# Altium PCB XDAmpPCB.PcbDoc
Units mm, origin at the board's own origin, x right, y up, seen from the top; angles counter-clockwise.
Board outline 149.99 x 99.95 mm, 2 copper layers (Top Layer, Bottom Layer); 83 components, 50 nets, 196 pads, 16 vias.
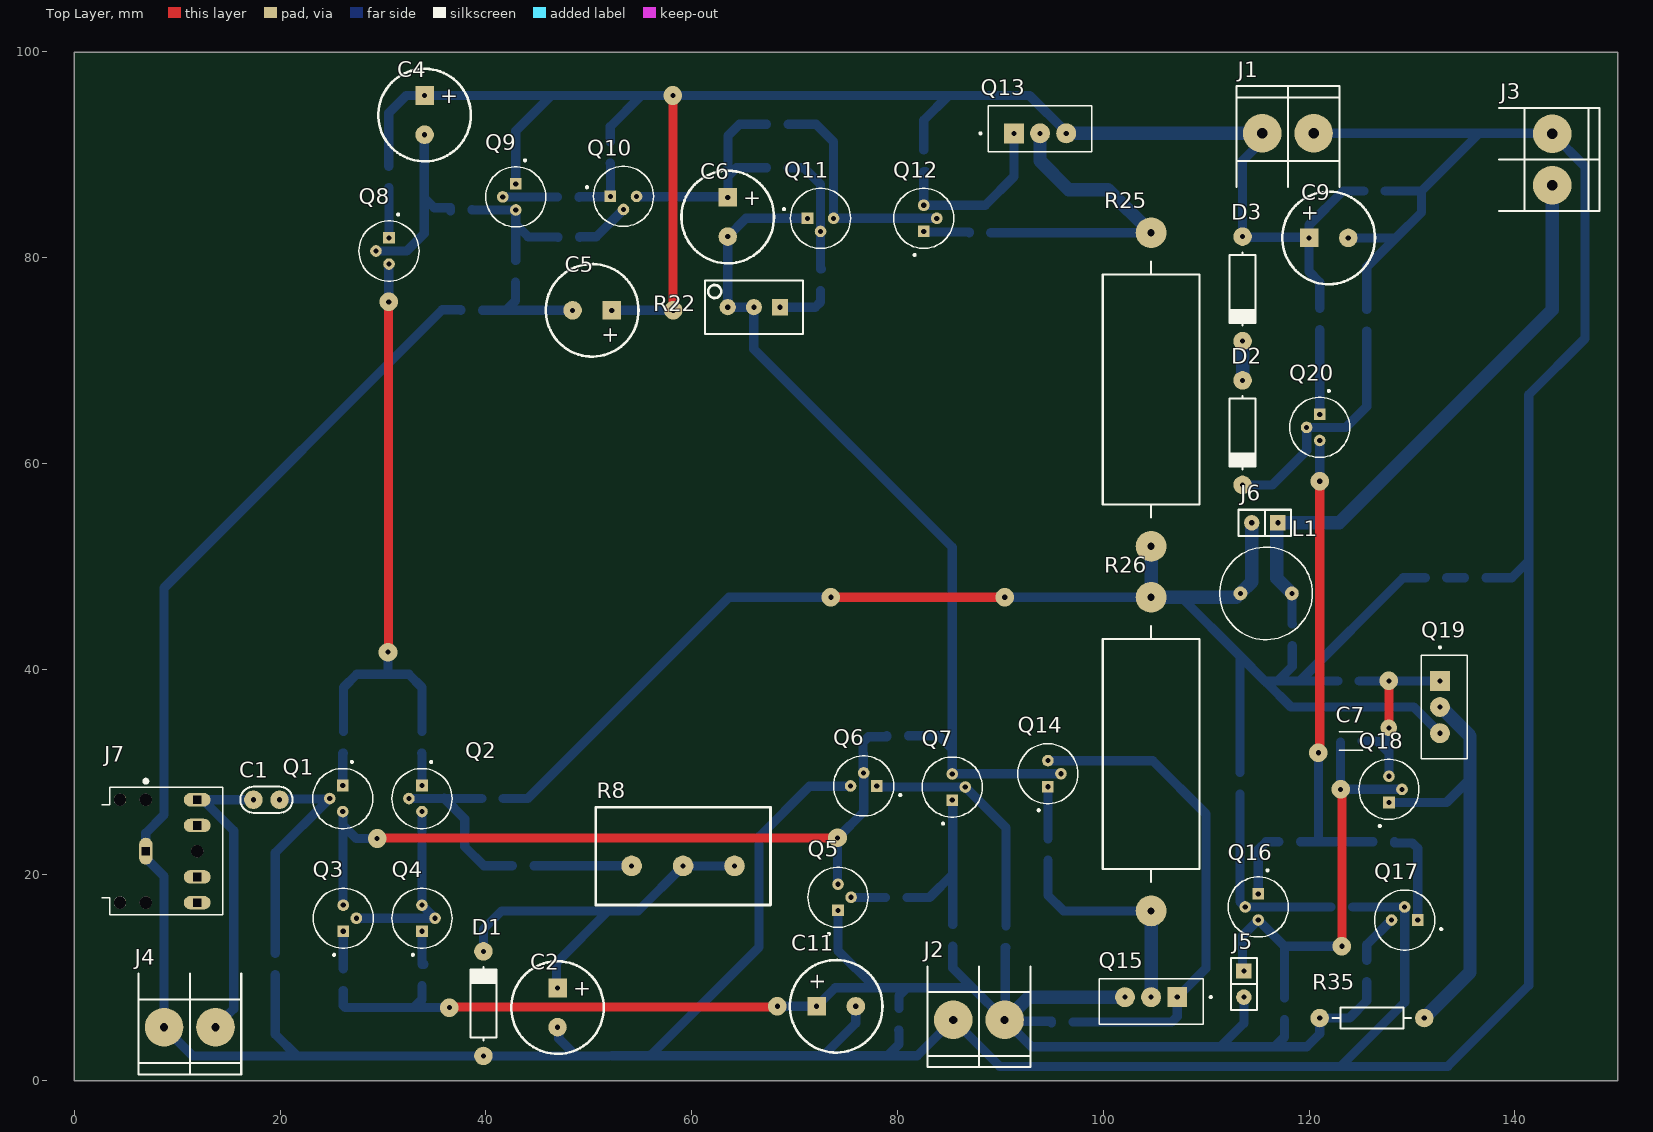
[diagram p0: Top Layer view]
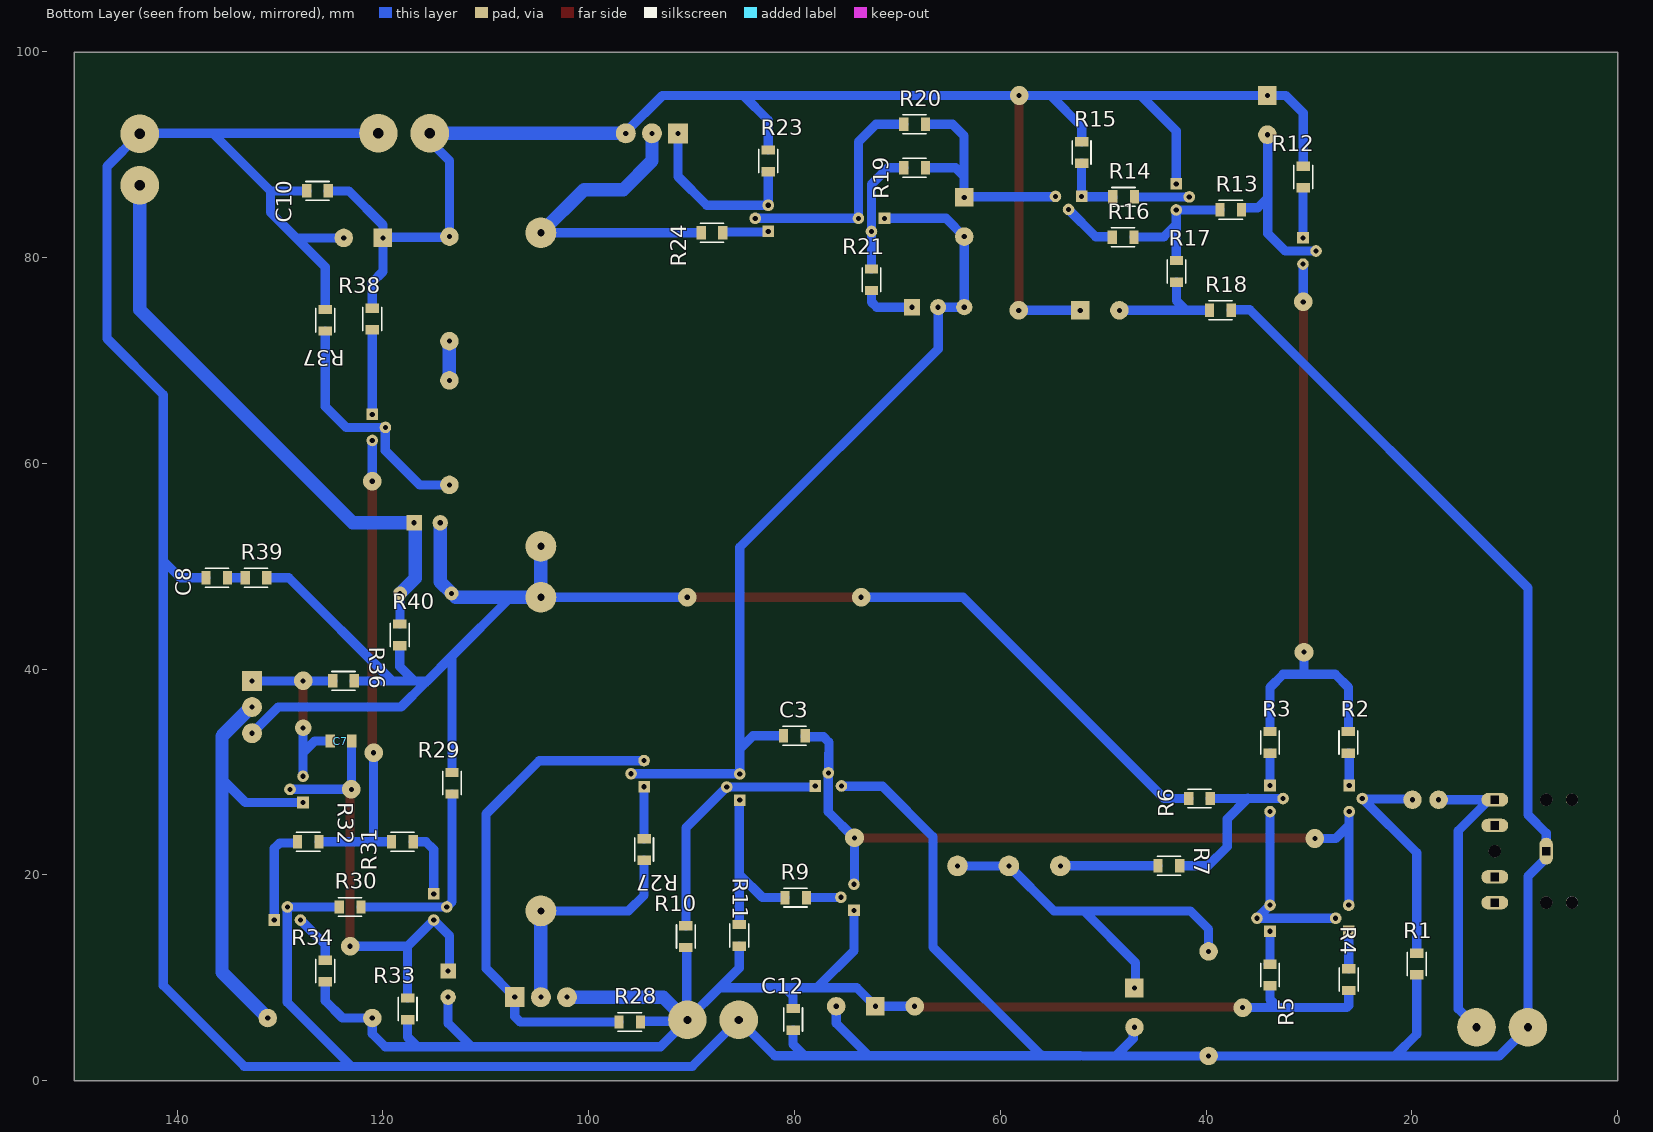
[diagram p1: Bottom Layer view, seen from below]
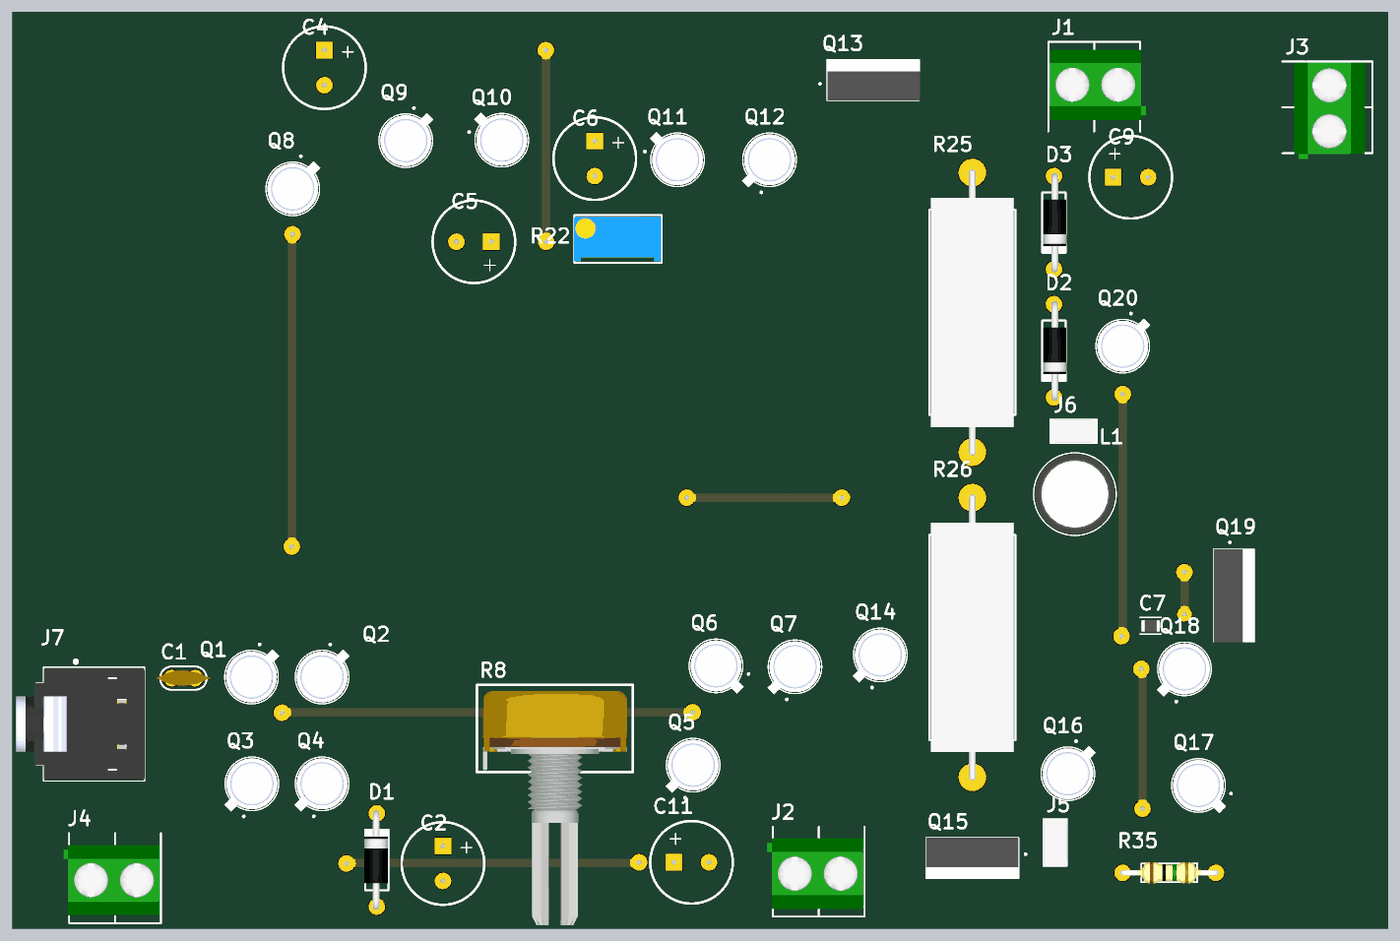
[diagram p2: 3D render of the assembled board from above, using the file's embedded part models]
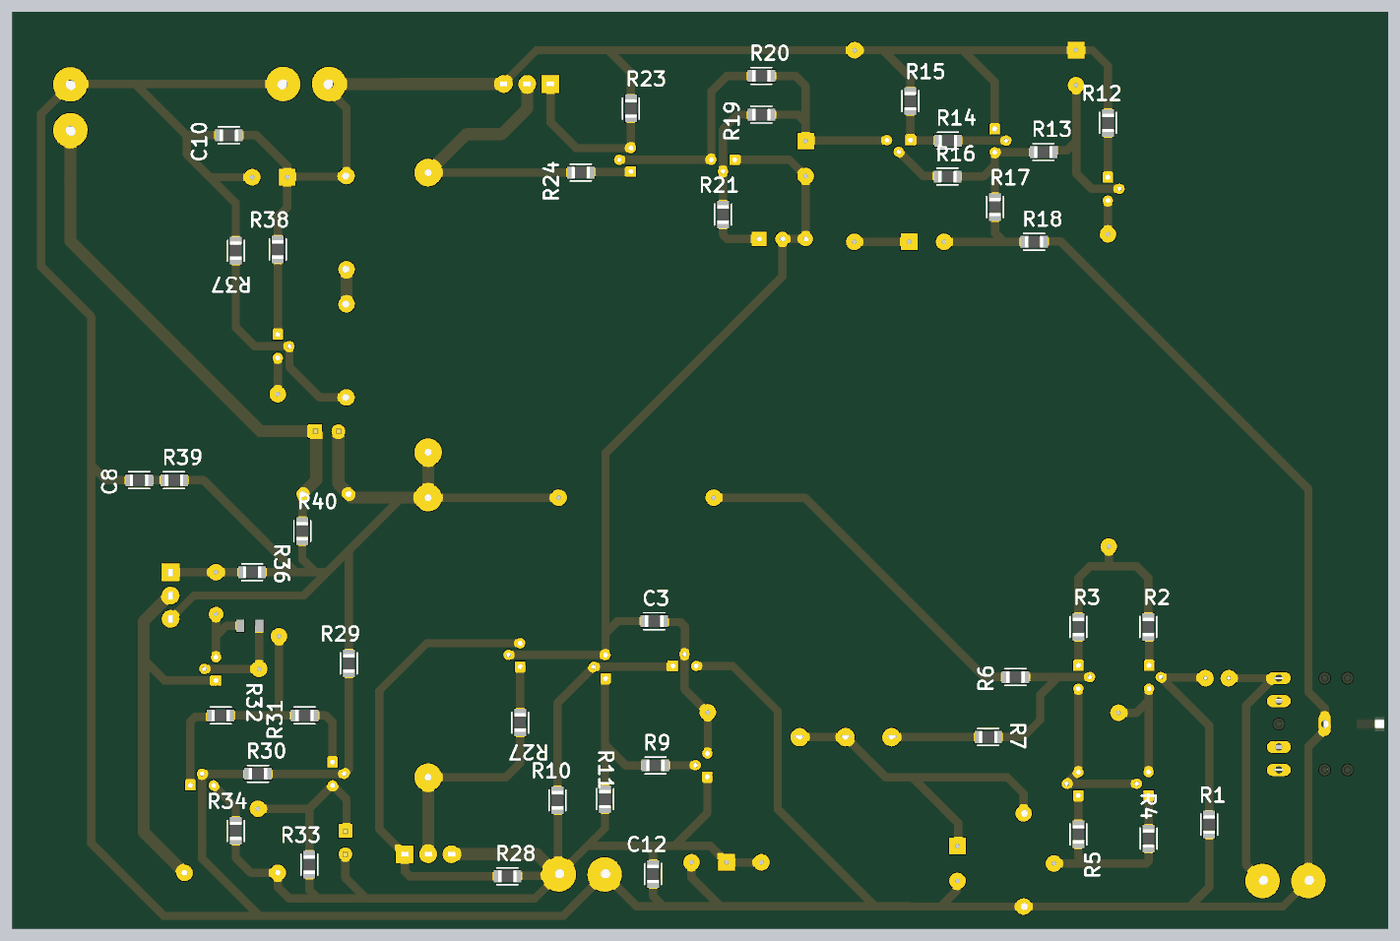
[diagram p3: 3D render of the assembled board from below, using the file's embedded part models]

## Layer stack, top to bottom
Top Solder: solder mask 0.0102, Solder Resist, Dk 3.5
Top Layer: signal copper 0.0356
Dielectric 1: dielectric 0.32, FR-4, Dk 4.8
Bottom Layer: signal copper 0.0356
Bottom Solder: solder mask 0.0102, Solder Resist, Dk 3.5

## Board outline
0,0 149.987,0 149.987,99.949 0,99.949

## Design rules (kind name [scope] priority, off if disabled: settings)
Clearance [All] p1: gap=0.254 ignorepadtopadclearanceinfootprint=FALSE except(0: Arc-Hole Track-Hole SMDPad-Hole THPad-Hole Via-Hole Fill-Hole Poly-Hole Region-Hole Text-Hole; 0.5: Arc-Poly Track-Poly SMDPad-Poly THPad-Poly Via-Poly Fill-Poly)
PolygonConnect [All] p1: connectstyle=Relief reliefconductorwidth=0.254 reliefentries=4 polygonreliefangle="90 Angle" airgapwidth=0.254
RoutingVias [All] p1: holewidth=0.711 width=1.27 viastyle="Through Hole" minholewidth=0.711 minwidth=1.27 maxholewidth=0.711 maxwidth=1.27
SolderMaskExpansion [All] p1: expansion=0.102
Width [All] p1: maxlimit=1.3 minlimit=0.9 preferedwidth=0.9
30 further rules are at their usual default settings.

## Components (designator, comment, footprint, x,y, rotation, side; value= is the part's Value field where it differs from the comment)
C1 "2.2u" CAP100 18.669,27.312 r0 top
C2 "220u" CAP300RP 46.956,7.112 r270 top
C3 "100p" 0805CAP#1 80.01,33.528 r180 bottom
C4 "47u" CAP300RP 34.036,93.853 r270 top
C5 "47u" CAP300RP 50.327,74.879 r180 top
C6 "47u" CAP300RP 63.5,83.947 r270 top
C7 "100p" 0805CAP#2 124.079,33.02 r0 top
C8 "0.1u" 0805CAP#1 136.144,48.895 r180 bottom
C9 "220u" CAP300RP 121.904,81.915 r0 top
C10 "100n" 0805CAP#1 126.365,86.487 r0 bottom
C11 "220u" CAP300RP 74.041,7.239 r0 top
C12 "100n" 0805CAP#1 80.137,5.969 r270 bottom
D1 "DIODO" DO41 39.751,7.493 r90 top
D2 "DIODO" DO41 113.538,62.992 r270 top
D3 "DIODO" DO41 113.538,76.962 r270 top
J1 "BORNERA" BORNERA2#1 117.94,92.078 r270 top
J2 "BORNERA" BORNERA2#2 87.909,5.918 r90 top
J3 "BORNERA" BORNERA2#1 143.637,89.535 r180 top
J4 "BORNERA 2" BORNERA2#2 11.216,5.207 r90 top
J5 "JMP" JUMPER2 113.665,9.398 r270 top
J6 "JMP" JUMPER2 115.697,54.229 r180 top
J7 "3.5JACK" 3.5JACK 6.938,22.312 r0 top
L1 "1u" RADIALIND 115.824,47.371 r0 top
Q1 "2N2907" TO-18 26.086,27.432 r270 top
Q2 "2N2907" TO-18 33.782,27.432 r270 top
Q3 "2N2222A" TO-18 26.137,15.799 r90 top
Q4 "2N2222A" TO-18 33.782,15.799 r90 top
Q5 "2N2222A" TO-18 74.219,17.831 r90 top
Q6 "2N2222A" TO-18 76.708,28.651 r180 top
Q7 "2N2222A" TO-18 85.319,28.55 r90 top
Q8 "2N2907" TO-18 30.582,80.645 r270 top
Q9 "2N2907" TO-18 42.901,85.903 r270 top
Q10 "2N2907" TO-18 53.365,85.954 r0 top
Q11 "2N2222A" TO-18 72.517,83.82 r0 top
Q12 "2N2222A" TO-18 82.55,83.82 r90 top
Q13 "TIP115" TO-220 93.853,92.082 r0 top
Q14 "2N2907" TO-18 94.615,29.845 r90 top
Q15 "TIP110" TO-220 104.648,8.128 r180 top
Q16 "2N2907" TO-18 115.062,16.891 r270 top
Q17 "2N2907" TO-18 129.286,15.621 r180 top
Q18 "2N2222A" TO-18 127.762,28.321 r90 top
Q19 "TIP115" TO-220 132.715,36.322 r270 top
Q20 "2N2907" TO-18 121.031,63.5 r270 top
R1 "120k" 0805 19.533,11.354 r90 bottom
R2 "100" 0805 26.162,32.893 r90 bottom
R3 "100" 0805 33.782,32.893 r90 bottom
R4 "68" 0805 26.137,9.83 r90 bottom
R5 "68" 0805 33.782,10.287 r90 bottom
R6 "120k" 0805 40.64,27.432 r180 bottom
R7 "3.9k" 0805 43.612,20.904 r0 bottom
R8 "100k" POTENCIOMETRO 59.157,20.879 r0 top
R9 "1k" 0805 79.883,17.805 r180 bottom
R10 "1k" 0805 90.551,14.004 r90 bottom
R11 "47" 0805 85.369,14.131 r90 bottom
R12 "150" 0805 30.556,87.833 r90 bottom
R13 "1k" 0805 37.601,84.658 r180 bottom
R14 "1k" 0805 48.006,85.903 r180 bottom
R15 "100" 0805 52.094,90.212 r270 bottom
R16 "1k" 0805 48.057,81.991 r180 bottom
R17 "10k" 0805 42.875,78.664 r270 bottom
R18 "10k" 0805 38.608,74.879 r180 bottom
R19 "820" 0805 68.326,88.733 r0 bottom
R20 "15" 0805 68.326,92.964 r0 bottom
R21 "100" 0805 72.517,77.851 r270 bottom
R22 "1k" "PRESET V" 66.04,75.184 r180 top
R23 "180" 0805 82.55,89.408 r270 bottom
R24 "10" 0805 88.011,82.423 r0 bottom
R25 "0.1" RES1200 104.648,67.183 r90 top
R26 "0.1" RES1200 104.648,31.75 r90 top
R27 "10" 0805 94.615,22.479 r270 bottom
R28 "180" 0805 96.012,5.715 r180 bottom
R29 "10k" 0805 113.284,28.922 r90 bottom
R30 "1k" 0805 123.19,16.891 r180 bottom
R31 "1k" 0805 118.11,23.241 r0 bottom
R32 "1k" 0805 127.254,23.241 r180 bottom
R33 "270" 0805 117.602,6.985 r90 bottom
R34 "270" 0805 125.603,10.668 r90 bottom
R35 "0.68" RES400 121.031,6.096 r0 top
R36 "470" 0805 123.825,38.862 r180 bottom
R37 "47k" 0805 125.603,73.914 r270 bottom
R38 "100" 0805 121.031,74.041 r90 bottom
R39 "10" 0805 132.334,48.895 r0 bottom
R40 "10" 0805 118.364,43.341 r270 bottom

## Footprints (in the part's own frame and the unit in brackets; to place one, negate y for a bottom-side part, rotate by r counter-clockwise, add the part's x,y. Pads: shape width x height; smd on the part's side, far side on the other; paste and mask are expansions set on the pad)
3.5JACK [mm]
  oval 1.308x2.616 hole 0.8 square: 1(0,0)
  oval 2.616x1.308 hole 0.8 square: 2(5,-5) 3(5,5) 10(5,-2.5) 11(5,2.5)
  round 1.2 hole 1.2 unplated: ""(-2.5,-5) ""(-2.5,5) ""(0,-5) ""(0,5) ""(5,0)
  silkscreen extent -4.3,-6.2 7.5,6.97, body extent -6.49,-6 7.51,6, height 5.5
0805 [mm]
  rect 0.9x1.3 smd: 1(-1.05,0) 2(1.05,0)
  silkscreen extent -1.14,-0.91 1.14,0.91, body extent -1,-0.63 1,0.63, height 0.58
0805CAP#1 [mm]
  rect 0.9x1.3 smd: 1(-1.05,0) 2(1.05,0)
  silkscreen extent -1.14,-0.91 1.14,0.91, body extent -1,-0.63 1,0.63, height 0.58
0805CAP#2 [mm]
  rect 0.9x1.3 smd far side: 1(-1.05,0) 2(1.05,0)
  silkscreen extent -1.14,-0.91 1.14,0.91, body extent -1,-0.63 1,0.63, height 0.58
BORNERA2#1 [mm] "Bornera con Tornillos 5mm separación"
  round 3.75 hole 1: 1(0,2.5) 2(0,-2.5)
  silkscreen extent -4.6,-5 5.2,5, body extent -3.76,-4.89 3.94,5.61, height 10
BORNERA2#2 [mm] "Bornera con Tornillos 5mm separación"
  round 3.75 hole 0.8: 1(0,2.5) 2(0,-2.5)
  silkscreen extent -4.6,-5 5.2,5, body extent -3.76,-4.89 3.94,5.61, height 10
CAP100 [mm]
  round 1.8 hole 0.5: 1(-1.27,0) 2(1.27,0)
  silkscreen extent -2.54,-1.27 2.54,1.27, body extent -2.92,-0.84 2.92,0.86, height 6.12
CAP300RP [mm]
  rect 1.8x1.8 hole 0.5: 1(-1.905,0)
  round 1.8 hole 0.5: 2(1.905,0)
  silkscreen extent -4.5,-4.5 4.5,4.5
DO41 [mm]
  round 1.8 hole 0.5: 1(-5.08,0) 2(5.08,0)
  silkscreen extent -3.56,-1.27 3.56,1.27, body extent -5.46,-1.19 5.46,1.37, height 2.03
JUMPER2 [mm]
  rect 1.5x1.5 hole 0.5: 1(-1.27,0)
  round 1.5 hole 0.5: 2(1.27,0)
  silkscreen extent -2.54,-1.27 2.54,1.27, body extent -2.46,-1.27 2.54,1.27, height 9.5
POTENCIOMETRO [mm]
  round 2 hole 0.5: 1(-5,0) 2(0,0) 3(5,0)
  silkscreen extent -8.5,-3.8 8.5,5.7, body extent -7.87,-20.53 7.87,5.03, height 20.12
"PRESET V" [mil]
  rect 62x62 hole 19.68: 1(-100,0)
  round 62 hole 19.68: 2(0,0) 3(100,0)
  silkscreen extent -188,-102 188,102, body extent -185,-95 190,95, height 455
RADIALIND [mm]
  round 1.35 hole 0.5: 1(-2.5,0) 2(2.5,0)
  silkscreen extent -4.5,-4.5 4.5,4.5, body extent -4.35,-4.35 4.35,4.35, height 12.5
RES400 [mm]
  round 1.8 hole 0.5: 1(0,0) 2(10.16,0)
  silkscreen extent 1.27,-1.02 8.89,1.02, body extent -0.3,-1.14 10.46,1.17, height 2.43
RES1200 [mm]
  round 3 hole 0.7: 1(-15.24,0) 2(15.24,0)
  silkscreen extent -12.45,-4.7 12.45,4.7, body extent -15.62,-4.5 15.61,4.5, height 9.51
TO-18 [mm]
  rect 1.13x1.13 hole 0.5: 1(-1.27,0)
  round 1.13 hole 0.5: 2(0,-1.27) 3(1.27,0)
  silkscreen extent -3.66,-2.92 2.92,2.92, body extent -3.02,-2.79 2.79,3.02, height 5.33
TO-220 [mm]
  rect 1.935x1.935 / inner round 1.935 / far side rect 1.935x1.935 hole 0.5: 1(-2.54,0)
  round 1.935 hole 0.5: 2(0,0) 3(2.54,0)
  silkscreen extent -5.9,-1.79 5.05,2.66, body extent -5.02,-1.78 5.08,2.67, height 19.84

## Part data
C1 C3 C7 C8 C10 C12: library part CAP, "Capacitor SMD 4.7nF"
C2 C4 C5 C6 C9 C11: library part CAPPOL
J1 J2 J3: library part "BORNERA 2"
J5 J6: library part JUMPER
J7: "3.5 mm Right-Angle Stereo Jack, 5 Pin PCB Mount, Non-Threaded", Package=None, Availability=Unavailable, MP=SJ1-3525N, Price=None
L1: library part INDUCTOR_1
Q3 Q4 Q5 Q6 Q7 Q11 Q12 Q13 Q15 Q18 Q19: Manufacturer=JSMSEMI, Supplier Part Number=C916390, Supplier=JLCPCB
R1 R2 R3 R4 R5 R6 R7 R9 R10 R11 R12 R13 R14 R15 R16 R18 R19 R20 R21 R23 R24 R25 R26 R27 R28 R29 R30 R31 R32 R33 R34 R35 R36 R37 R38 R39 R40: library part RES, "Resistencia SMD 470ohms"
R8: library part POTENCIOMETRO
R17: library part RES
R22: library part PRESET

## Via types
v1: diameter 1.8, hole 0.5, Top Layer to Bottom Layer, 15 vias
v2: diameter 1.6, hole 0.5, Top Layer to Bottom Layer, 1 vias

## Nets (pads, with @x,y where several pads share a name; then routed paths per layer and width w, separated by ;. In a path a pad name is that pad's centre, name@x,y a point inside that pad or via, vN(x,y) a via of type N, cw(c..) or ccw(c..) an arc to the next point about the centre after c; other vN are vias at no path point)
-VCC: C11.1 C12.1 J2.2 J5.2 Q5.1 Q15.3 R4.1 R5.1 R10.1 R11.1 R28.2 R33.1 R34.1 R35.1 | length 160.5
  Top Layer w0.9: v1(36.449,7.112) 36.512,7.175 68.263,7.175 v1(68.326,7.239)
  Bottom Layer w0.9: R4.1 26.137,7.309 26.334,7.112 32.969,7.112 ; R5.1 33.782,7.874 33.731,7.874 32.969,7.112 ; v1(36.449,7.112) 32.969,7.112 ; v1(68.326,7.239) C11.1 73.939,9.042 77.826,9.042 ; Q5.1 74.219,12.649 77.826,9.042 ; C12.1 80.137,8.255 80.924,9.042 ; R11.1 85.369,10.958 87.285,9.042 ; R10.1 90.48,12.954 90.48,5.989 J2.2@90.435,5.944 ; J2.2@90.576,5.944 J2.2@90.435,5.944 ; R28.2@94.962,5.639 R28.2 94.962,5.779 J2.2@90.549,5.779 ; J5.2 113.665,5.588 111.379,3.302 ; R33.1 117.602,4.262 116.642,3.302 ; R34.1 125.603,7.766 123.933,6.096 R35.1 121.031,4.572 119.761,3.302 116.642,3.302 ; 77.826,9.042 80.924,9.042 ; 80.924,9.042 87.285,9.042 ; 87.285,9.042 J2.2 ; J2.2 J2.2@90.549,5.779 ; J2.2 J2.2@90.435,5.944 ; J2.2@90.549,5.779 93.026,3.302 111.379,3.302 ; 111.379,3.302 116.642,3.302
  Bottom Layer w1.3: J2.2@90.576,5.944 92.76,8.128 Q15.3
GND: C2.2 C8.1 C9.2 C10.2 C11.2 C12.2 D1.1 J1.1 J2.1 J3.2 J4.1 J7.1 Q6.3 Q17.2 R1.1 R18.2 R30.1 R37.1 | length 449.1
  Bottom Layer w0.9: R1.1 19.533,4.521 21.641,2.413 ; R18.2 37.558,74.93 35.763,74.93 8.716,47.883 8.716,25.849 6.938,24.071 J7.1 6.938,21.658 8.716,19.88 J4.1 11.51,2.413 21.641,2.413 ; C2.2 47.071,5.092 47.071,4.11 48.768,2.413 ; 51.943,2.413 48.768,2.413 ; 52.216,2.432 72.79,2.432 ; 56.12,2.576 66.548,13.005 66.548,23.724 71.45,28.626 75.286,28.626 Q6.3@75.253,28.658 ; C11.2 75.946,5.588 72.79,2.432 ; C12.2@80.086,4.919 C12.2 80.137,3.556 79.013,2.432 ; J1.1 136.528,92.078 ; C9.2 128.437,81.915 ; R30.1 Q17.2 129.286,7.62 123.063,1.397 ; R37.1 125.603,79.081 128.437,81.915 ; C10.2@127.415,86.467 C10.2 130.937,86.487 ; C8.1 139.7,48.895 141.351,50.546 ; 141.351,47.625 141.351,9.271 133.477,1.397 123.063,1.397 ; 141.351,47.879 141.351,50.546 ; 21.641,2.413 D1.1 48.768,2.413 ; 72.79,2.432 79.013,2.432 ; 79.013,2.432 81.923,2.432 J2.1 89.931,1.397 123.063,1.397 ; 128.437,81.915 130.937,84.415 130.937,86.487 ; 130.937,86.487 136.528,92.078 ; 136.528,92.078 143.594,92.078 J3.2 146.812,88.86 146.812,72.136 141.351,66.675 141.351,50.546
IoRefDP: Q8.3 R2.2 R3.2 | length 57.2
  Top Layer w0.9: v1(30.48,41.656) 30.518,41.694 30.518,75.654 v1(30.556,75.692)
  Bottom Layer w0.9: R2.2 26.162,38.227 27.432,39.497 30.48,39.497 ; v1(30.48,41.656) 30.48,39.497 ; v1(30.556,75.692) 30.556,79.35 Q8.3 ; R3.2 33.782,38.227 32.512,39.497 30.48,39.497
IoRefVbb: C6.1 Q10.3 R19.1 R20.1 | length 23.2
  Bottom Layer w0.9: Q10.3 54.679,85.91 63.442,85.91 C6.1 63.525,85.877 63.525,87.909 ; R19.1 64.349,88.733 63.525,87.909 ; R20.1 64.643,92.964 63.525,91.846 63.525,87.909
NetC1_2: C1.2 Q1.2 R1.2 | length 22.1
  Bottom Layer w0.9: R1.2 19.533,22.149 Q1.2@24.772,27.388 ; C1.2 20.015,27.388 Q1.2@24.772,27.388 ; Q1.2 Q1.2@24.772,27.388
NetC2_1: C2.1 D1.2 R8.2 R8.3 | length 38.7
  Bottom Layer w0.9: D1.2 39.751,14.732 41.529,16.51 51.892,16.51 ; C2.1 46.863,9.11 46.863,11.481 51.892,16.51 ; R8.3 R8.2 54.788,16.51 51.892,16.51
NetC4_2: C4.2 Q8.2 R13.2 | length 18.1
  Bottom Layer w0.9: Q8.2 32.309,80.645 34.011,82.347 34.011,85.827 ; 34.011,88.417 34.011,85.827 ; 34.011,88.621 34.011,91.923 C4.2 ; R13.2@36.551,84.531 R13.2 36.551,84.858 34.979,84.858 34.011,85.827
NetC5_2: C5.2 R17.2 R18.1 | length 11.9
  Bottom Layer w0.9: R18.1 41.941,74.879 ; R17.2 42.875,75.814 41.941,74.879 ; C5.2 41.941,74.879
NetC7_1: C7.1 J5.1 Q16.3 Q18.2 R33.2 | length 45.7
  Top Layer w0.9: v1(123.063,28.321) 123.19,28.194 v1(123.19,13.081)
  Bottom Layer w0.9: J5.1 113.538,10.795 113.538,14.097 Q16.3 117.602,13.081 ; R33.2 117.602,13.081 ; C7.1@123.063,32.893 v1(123.063,28.321) Q18.2 ; v1(123.19,13.081) 117.602,13.081
NetC7_2: C7.2 Q18.3 Q19.1 R36.1 | length 20.2
  Top Layer w0.9: v2(127.762,34.29) v1(127.762,38.862)
  Bottom Layer w0.9: R36.1 v1(127.762,38.862) Q19.1 ; C7.2@125.163,33.02 126.619,33.02 127.762,31.877 ; Q18.3 127.762,31.877 ; v2(127.762,34.29) 127.762,31.877
NetC8_2: C8.2 R39.2 | length 1.7
  Bottom Layer w0.9: R39.2 C8.2
NetD2_1: D2.1 D3.2 | length 3.8
  Bottom Layer w1.3: D2.1@113.536,68.074 D2.1 D3.2 D3.2@113.54,71.88
NetD2_2: D2.2 Q20.2 R37.2 | length 23.9
  Bottom Layer w0.9: D2.2 116.416,57.912 119.761,61.257 Q20.2 123.571,63.5 125.603,65.532 R37.2
NetQ1_1: Q1.1 R2.1 | length 3.2
  Bottom Layer w0.9: Q1.1 26.086,31.843 R2.1
NetQ2_1: Q2.1 R3.1 | length 3.2
  Bottom Layer w0.9: R3.1@33.744,31.843 R3.1 Q2.1 Q2.1@33.82,28.74
NetQ2_2: Q2.2 R6.2 R7.1 | length 18
  Bottom Layer w0.9: Q2.2 Q2.2 35.918,27.432 35.942,27.456 35.966,27.432 ; R6.2 35.966,27.432 ; R7.1 39.802,20.904 37.948,22.758 37.948,25.451 35.966,27.432
NetQ2_3: Q2.3 Q3.2 Q4.2 Q4.3 | length 18.6
  Bottom Layer w0.9: Q3.2 Q4.2 Q4.3 Q2.3 Q2.3@33.744,26.124
NetQ3_1: Q3.1 R4.2 | length 3.8
  Bottom Layer w0.9: R4.2 Q3.1 Q3.1@26.252,14.414
NetQ4_1: Q4.1 R5.2 | length 3.4
  Bottom Layer w0.9: Q4.1 R5.2 R5.2@33.982,11.337
NetQ5_2: Q5.2 R9.2 | length 3.4
  Bottom Layer w0.9: Q5.2 75.501,17.818 78.833,17.818 R9.2
NetQ6_1: Q6.1 Q7.2 R10.2 | length 23.8
  Bottom Layer w0.9: Q6.1 78.079,28.551 Q7.2 Q7.2 90.551,24.587 R10.2
NetQ7_1: Q7.1 R9.1 R11.2 | length 17.3
  Bottom Layer w0.9: R9.1 83.109,17.805 85.369,20.066 ; Q7.1@85.369,27.127 85.369,20.066 ; R11.2@85.395,15.181 R11.2 85.369,16.485 85.369,20.066
NetQ8_1: Q8.1 R12.1 | length 4.9
  Bottom Layer w0.9: R12.1 30.569,86.783 30.569,81.928 Q8.1
NetQ9_2: Q9.2 R14.2 | length 5.3
  Bottom Layer w0.9: Q9.2 R14.2
NetQ9_3: Q9.3 R13.1 R16.2 R17.1 | length 13.8
  Bottom Layer w0.9: R13.1@38.651,84.671 R13.1 38.651,84.633 Q9.3 42.888,84.62 42.888,82.982 ; R17.1 42.888,79.714 42.888,82.982 ; R16.2 47.007,82.017 44.12,82.017 43.155,82.982 42.888,82.982
NetQ10_1: Q10.1 R14.1 R15.2 | length 6.4
  Bottom Layer w0.9: R14.1@49.056,85.852 R14.1 49.056,85.928 52.07,85.928 Q10.1 ; R15.2@52.056,89.162 R15.2 Q10.1
NetQ10_2: Q10.2 R16.1 | length 5.4
  Bottom Layer w0.9: R16.1 49.107,82.042 50.724,82.042 Q10.2
NetQ11_2: Q11.2 R19.2 R21.1 | length 12.1
  Bottom Layer w0.9: R19.2 70.906,88.733 72.517,87.122 Q11.2 R21.1 R21.1@72.6,78.901
NetQ12_1: Q12.1 R24.1 | length 4.5
  Bottom Layer w0.9: Q12.1 82.614,82.486 86.961,82.486 R24.1
NetQ12_3: Q12.3 Q13.1 R23.2 | length 17.7
  Bottom Layer w0.9: R23.2@82.733,88.358 R23.2 Q12.3 88.519,85.09 91.313,87.884 Q13.1@91.313,91.948 ; Q13.1 Q13.1@91.313,91.948 ; Q13.1@91.44,92.075 Q13.1@91.313,91.948
NetQ13_2: Q13.2 R24.2 R25.2 | length 31.9
  Bottom Layer w0.9: R24.2 R25.2
  Bottom Layer w1.3: Q13.2 93.853,89.408 96.647,86.614 100.457,86.614 R25.2
NetQ14_1: Q14.1 R27.1 | length 5
  Bottom Layer w0.9: R27.1 Q14.1
NetQ14_3: Q14.3 Q15.1 R28.1 | length 48.7
  Bottom Layer w0.9: Q14.3 104.8,31.115 109.982,25.933 109.982,10.922 Q15.1 107.188,6.242 106.661,5.715 R28.1
NetQ15_2: Q15.2 R26.1 R27.2 | length 22.4
  Bottom Layer w0.9: R27.2 94.615,18.034 96.139,16.51 R26.1
  Bottom Layer w1.3: Q15.2 R26.1
NetQ16_1: Q16.1 R31.1 | length 6.6
  Bottom Layer w0.9: Q16.1 115.062,22.479 115.824,23.241 R31.1
NetQ16_2: Q16.2 R29.1 R30.2 | length 19.5
  Bottom Layer w0.9: R29.1 113.284,17.399 Q16.2 R30.2
NetQ17_1: Q17.1 R32.1 | length 9.6
  Bottom Layer w0.9: R32.1 128.304,23.114 130.029,23.114 130.556,22.587 Q17.1
NetQ17_3: Q17.3 R34.2 | length 4.9
  Bottom Layer w0.9: R34.2 125.603,13.208 Q17.3
NetQ18_1: Q18.1 Q19.2 R35.2 | length 42.2
  Bottom Layer w0.9: Q18.1 133.35,27.051 135.636,29.337
  Bottom Layer w1.3: R35.2 135.636,10.541 135.636,29.337 135.636,33.508 132.822,36.322 Q19.2
NetQ20_1: Q20.1 R38.1 | length 8.2
  Bottom Layer w0.9: Q20.1 R38.1
NetQ20_3: Q20.3 R31.2 R32.2 | length 46.3
  Top Layer w0.9: v1(120.904,31.877) 121.031,32.004 v1(121.031,58.266)
  Bottom Layer w0.9: R31.2 120.904,23.241 ; v1(120.904,31.877) 120.904,23.241 ; v1@120.904,58.139 v1(121.031,58.266) Q20.3 ; R32.2 120.904,23.241
NetR7_2: R7.2 R8.1 | length 9.7
  Bottom Layer w0.9: R7.2 44.662,20.892 54.144,20.892 R8.1 R8.1@54.03,20.752
NetR21_2: R21.2 R22.1 | length 5.3
  Bottom Layer w0.9: R22.1 72.009,75.184 72.517,75.692 R21.2
VCC: C4.1 C5.1 C9.1 C10.1 D3.1 J1.2 Q9.1 Q13.3 R12.2 R15.1 R23.1 R38.2 | length 173.8
  Top Layer w0.9: v1(58.166,95.758) 58.187,95.737 58.187,74.9 v1(58.208,74.879)
  Bottom Layer w0.9: R12.2 30.556,94.056 32.258,95.758 C4.1 46.355,95.758 ; Q9.1 42.901,92.304 46.355,95.758 ; R15.1 52.07,91.262 52.07,92.735 55.093,95.758 ; C5.1 v1(58.208,74.879) ; R23.1 82.55,93.345 84.963,95.758 ; Q13.3 96.393,92.202 92.837,95.758 84.963,95.758 ; J1.2 115.44,91.321 113.538,89.419 D3.1 113.602,81.978 119.936,81.978 C9.1 ; R38.2 121.031,77.614 119.999,78.646 C9.1 ; C10.1 123.317,86.487 119.999,83.169 C9.1 ; 46.355,95.758 55.093,95.758 ; 55.093,95.758 v1(58.166,95.758) 84.963,95.758
  Bottom Layer w1.3: Q13.3 107.863,92.082 107.866,92.078 J1.2
Vin: C1.1 J4.2 J7.3 | length 29.6
  Bottom Layer w0.9: J7.3 J7.3@12.482,27.312 ; J4.2 15.494,6.985 15.494,24.3 J7.3@12.482,27.312 ; C1.1 J7.3@12.482,27.312
Vo: J3.1 J6.1 L1.2 R40.1 | length 57.9
  Bottom Layer w0.9: J6.1@116.84,54.102 J6.1 ; L1.2 118.344,47.351 118.344,44.391 R40.1
  Bottom Layer w1.3: J6.1@116.84,54.102 116.84,48.855 L1.2 ; J6.1 122.936,54.229 143.637,74.93 J3.1
VoDP: C3.2 Q1.3 Q3.3 Q5.3 Q6.2 | length 75.3
  Top Layer w0.9: v1(29.413,23.546) 29.464,23.597 v1(74.168,23.597)
  Bottom Layer w0.9: Q1.3 26.111,26.137 26.111,24.841 ; Q3.3 26.111,17.094 26.111,24.841 ; v1(29.413,23.546) 27.407,23.546 26.111,24.841 ; v1@74.181,23.584 v1(74.168,23.597) ; Q5.3 74.168,19.152 v1(74.168,23.597) ; C3.2 78.96,33.426 77.184,33.426 76.657,32.899 76.657,31.834 76.664,31.827 76.664,29.965 Q6.2 76.708,26.137 v1(74.168,23.597)
VoFeed: J6.2 L1.1 Q19.3 R6.1 R25.1 R26.2 R29.2 R36.2 R39.1 R40.2 | length 161.4
  Top Layer w0.9: v1(73.533,46.99) v1(90.424,46.99)
  Bottom Layer w0.9: R6.1 44.069,27.432 63.627,46.99 v1(73.533,46.99) ; v1(90.424,46.99) R26.2 ; 107.569,46.99 113.284,41.275 ; L1.1@112.943,46.99 L1.1 ; R29.2 113.284,41.275 ; R40.2 118.364,40.259 116.967,38.862 ; 118.999,38.862 116.967,38.862 ; R36.2 119.126,38.862 129.159,48.895 R39.1 ; Q19.3 130.175,36.322 118.237,36.322 115.887,38.672 116.078,38.862 ; 113.284,41.275 115.697,38.862 116.078,38.862 ; 116.078,38.862 116.967,38.862
  Bottom Layer w1.3: R25.1 R26.2 107.569,46.99 L1.1@112.943,46.99 ; L1.1 114.427,48.474 J6.2
VoVAS: C3.1 C6.2 Q7.3 Q11.1 Q14.2 R22.2 R22.3 | length 86.7
  Bottom Layer w0.9: Q11.1@71.193,83.874 Q11.1 65.278,83.82 C6.2 R22.3 R22.2 66.04,71.12 85.319,51.841 85.319,32.233 ; C3.1@81.06,33.541 C3.1 84.023,33.528 85.319,32.233 ; Q14.2 Q14.2 85.343,29.844 Q7.3 85.319,32.233
VoVbb: Q11.3 Q12.2 R20.2 | length 22.6
  Bottom Layer w0.9: R20.2 72.085,92.964 73.787,91.262 Q11.3 Q12.2
pads on no net: J7. J7.2 J7.10 J7.11

## Other copper
Top Layer:
  region net IoRefDP: 30.531,76.657

## Text inside footprints (layer, text, board x,y; h text height)
C2: Top Overlay "+" at 48.48,8.255 h1.52
C4: Top Overlay "+" at 35.56,94.996 h1.52
C5: Top Overlay "+" at 51.47,73.355 h1.52 r270
C6: Top Overlay "+" at 65.024,85.09 h1.52
C9: Top Overlay "+" at 120.761,83.439 h1.52 r90
C11: Top Overlay "+" at 72.898,8.763 h1.52 r90